# Altium PCB PCBLIB.PcbDoc
Units mil, origin at the board's own origin, x right, y up, seen from the top; angles counter-clockwise.
Board outline 6000 x 4000 mil, 2 copper layers (Top Layer, Bottom Layer); 15 components, 0 nets, 122 pads, 0 vias.
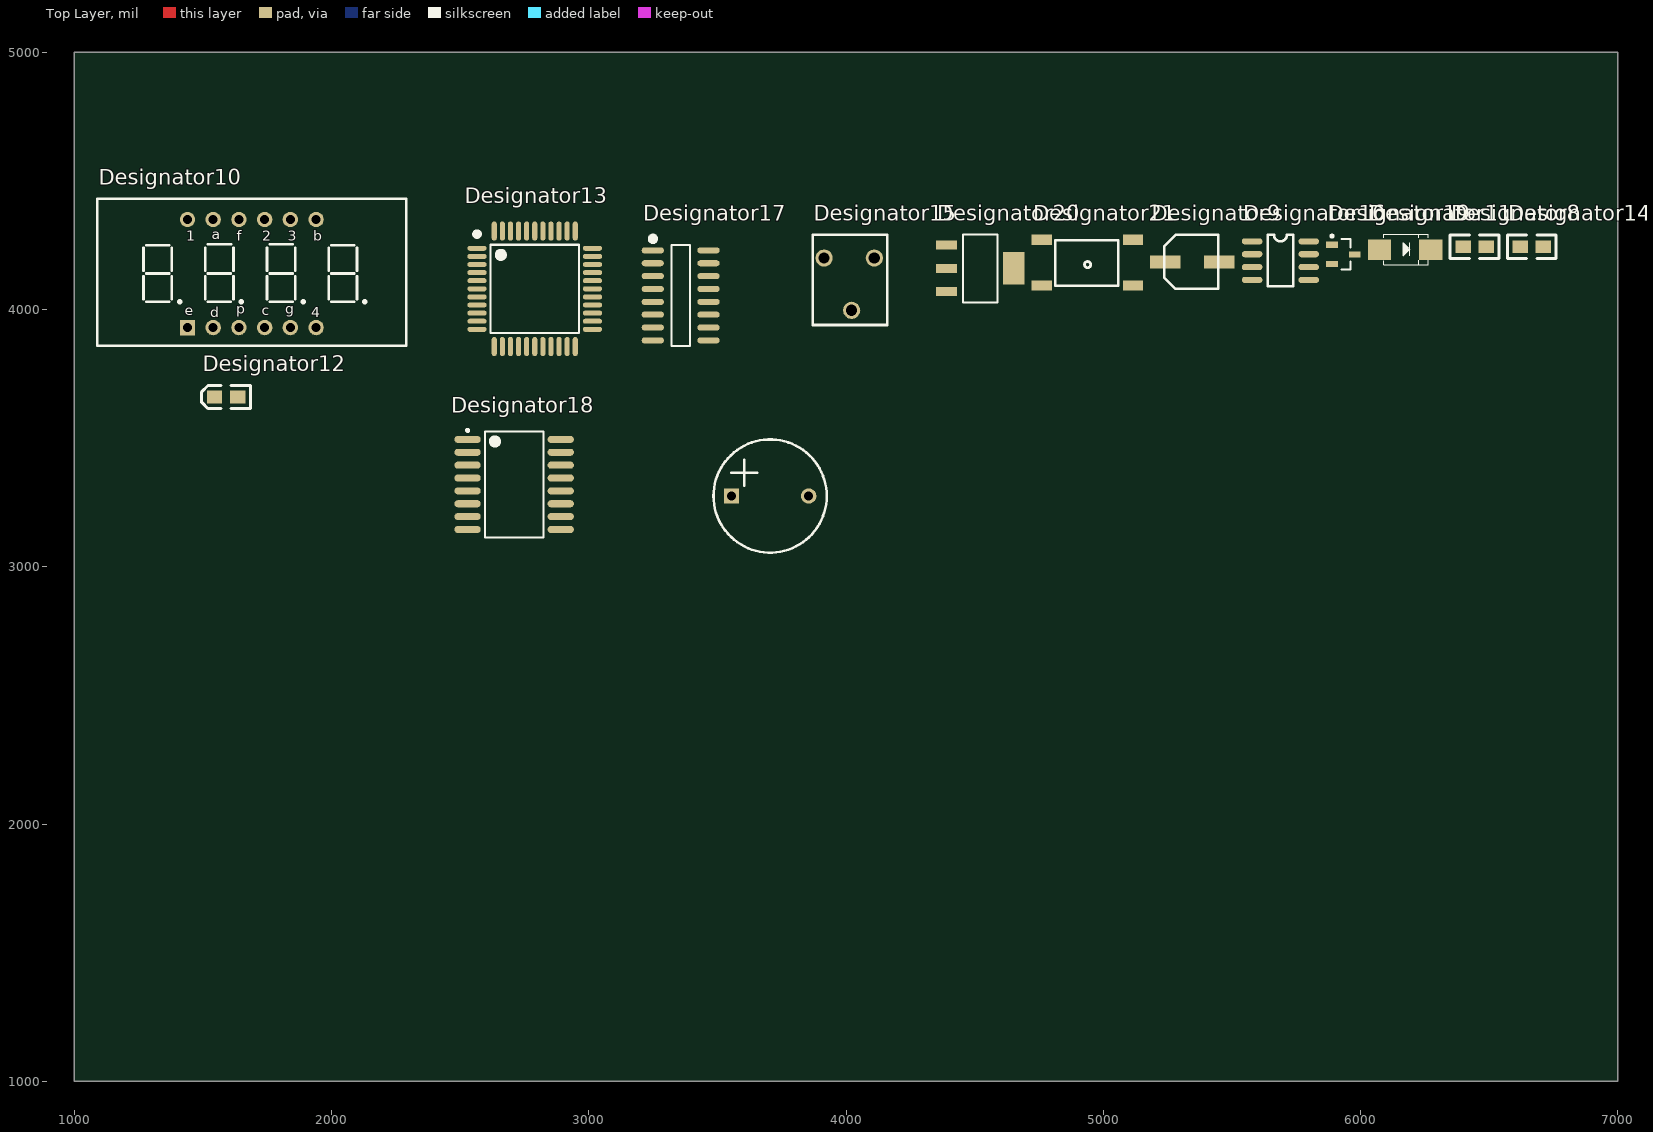
[diagram p0: Top Layer view]
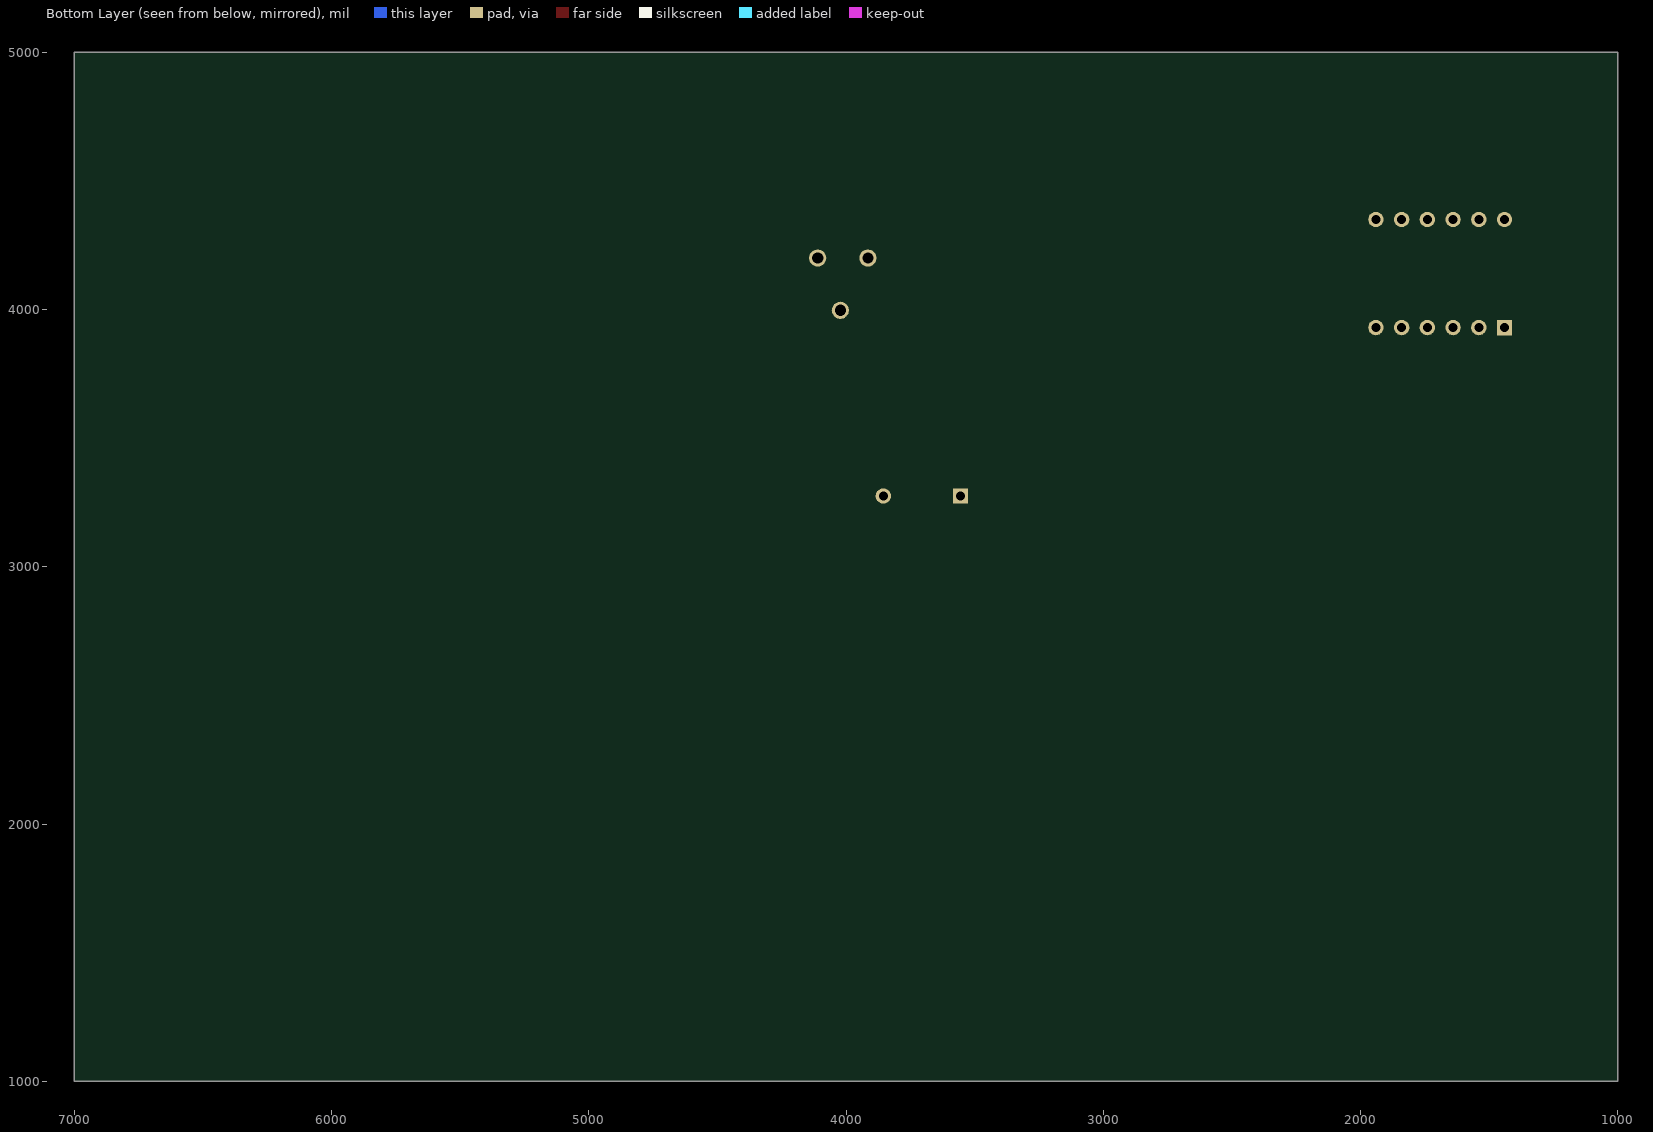
[diagram p1: Bottom Layer view, seen from below]

## Layer stack, top to bottom
Top Solder: solder mask 0.4, Solder Resist, Dk 3.5
Top Layer: signal copper 1.4
Dielectric 1: dielectric 12.6, FR-4, Dk 4.8
Bottom Layer: signal copper 1.4
Bottom Solder: solder mask 0.4, Solder Resist, Dk 3.5

## Board outline
1000,1000 7000,1000 7000,5000 1000,5000

## Design rules (kind name [scope] priority, off if disabled: settings)
AssemblyTestPointUsage [All] p0: scope1count=1 scope1_0_kind=Board scope1_0_value=Board scope2count=1 scope2_0_kind=Board scope2_0_value=Board commentlength=0
AssemblyTestpoint [All] p0: scope1count=1 scope1_0_kind=Board scope1_0_value=Board scope2count=1 scope2_0_kind=Board scope2_0_value=Board commentlength=0
Clearance [All] p0: scope1count=1 scope1_0_kind=Board scope1_0_value=Board scope2count=1 scope2_0_kind=Board scope2_0_value=Board commentlength=0 gap=10
Clearance [All] p1: gap=10 ignorepadtopadclearanceinfootprint=FALSE except(0: Arc-Hole Track-Hole SMDPad-Hole THPad-Hole Via-Hole Fill-Hole Poly-Hole Region-Hole Text-Hole)
ComponentClearance [All] p0: scope1count=1 scope1_0_kind=Board scope1_0_value=Board scope2count=1 scope2_0_kind=Board scope2_0_value=Board commentlength=0 gap=10 collisioncheckmode=3
DiffPairsRouting [All] p0: scope1count=1 scope1_0_kind=Board scope1_0_value=Board scope2count=1 scope2_0_kind=Board scope2_0_value=Board commentlength=0
FabricationTestPointUsage [All] p0: scope1count=1 scope1_0_kind=Board scope1_0_value=Board scope2count=1 scope2_0_kind=Board scope2_0_value=Board commentlength=0 valid=0 allowmultiple=FALSE
FabricationTestpoint [All] p0: scope1count=1 scope1_0_kind=Board scope1_0_value=Board scope2count=1 scope2_0_kind=Board scope2_0_value=Board commentlength=0 side=3 testpointundercomponent=TRUE minsize=40 maxsize=100 preferedsize=60 minholesize=0 maxholesize=40 preferedholesize=32 testpointgrid=1
FanoutControl Fanout_BGA [All] p0 off: scope1count=1 scope1_0_kind=Board scope1_0_value=Board scope2count=1 scope2_0_kind=Board scope2_0_value=Board commentlength=69 // Protel DXP Scope 1 Expression Was: IsBGA   Fanout_BGA (Default Rule)
FanoutControl Fanout_LCC [All] p0 off: scope1count=1 scope1_0_kind=Board scope1_0_value=Board scope2count=1 scope2_0_kind=Board scope2_0_value=Board commentlength=69 // Protel DXP Scope 1 Expression Was: IsLCC   Fanout_LCC (Default Rule)
FanoutControl Fanout_SOIC [All] p0 off: scope1count=1 scope1_0_kind=Board scope1_0_value=Board scope2count=1 scope2_0_kind=Board scope2_0_value=Board commentlength=71 // Protel DXP Scope 1 Expression Was: IsSOIC   Fanout_SOIC (Default Rule)
FanoutControl Fanout_Small [All] p0 off: scope1count=1 scope1_0_kind=Board scope1_0_value=Board scope2count=1 scope2_0_kind=Board scope2_0_value=Board commentlength=84 // Protel DXP Scope 1 Expression Was: (CompPinCount < 5)   Fanout_Small (Default Rule)
FanoutControl Fanout_Default [All] p0: scope1count=1 scope1_0_kind=Board scope1_0_value=Board scope2count=1 scope2_0_kind=Board scope2_0_value=Board commentlength=30 // Fanout_Default (Default Rule)
Height [All] p0: scope1count=1 scope1_0_kind=Board scope1_0_value=Board scope2count=1 scope2_0_kind=Board scope2_0_value=Board commentlength=0
HoleSize [All] p0: scope1count=1 scope1_0_kind=Board scope1_0_value=Board scope2count=1 scope2_0_kind=Board scope2_0_value=Board commentlength=0 absolutevalues=TRUE maxlimit=100 minlimit=1 maxpercent=80.000 minpercent=20.000
HoleToHoleClearance [All] p0: scope1count=1 scope1_0_kind=Board scope1_0_value=Board scope2count=1 scope2_0_kind=Board scope2_0_value=Board commentlength=0
LayerPairs [All] p0: scope1count=1 scope1_0_kind=Board scope1_0_value=Board scope2count=1 scope2_0_kind=Board scope2_0_value=Board commentlength=0 enforce=TRUE
MinimumSolderMaskSliver [All] p0: scope1count=1 scope1_0_kind=Board scope1_0_value=Board scope2count=1 scope2_0_kind=Board scope2_0_value=Board commentlength=0
NetAntennae [All] p0: scope1count=1 scope1_0_kind=Board scope1_0_value=Board scope2count=1 scope2_0_kind=Board scope2_0_value=Board commentlength=0
PasteMaskExpansion [All] p0: scope1count=1 scope1_0_kind=Board scope1_0_value=Board scope2count=1 scope2_0_kind=Board scope2_0_value=Board commentlength=0 expansion=0
PlaneClearance [All] p0: scope1count=1 scope1_0_kind=Board scope1_0_value=Board scope2count=1 scope2_0_kind=Board scope2_0_value=Board commentlength=0 clearance=20
PlaneConnect [All] p0: scope1count=1 scope1_0_kind=Board scope1_0_value=Board scope2count=1 scope2_0_kind=Board scope2_0_value=Board commentlength=0 planeconnectstyle=Relief reliefexpansion=20 reliefentries=4 reliefconductorwidth=10 reliefairgap=10
PolygonConnect [All] p0: scope1count=1 scope1_0_kind=Board scope1_0_value=Board scope2count=1 scope2_0_kind=Board scope2_0_value=Board commentlength=0 connectstyle=Relief reliefconductorwidth=10 reliefentries=4 polygonreliefangle="90 Angle"
PolygonConnect [All] p1: connectstyle=Relief reliefconductorwidth=10 reliefentries=4 polygonreliefangle="90 Angle" airgapwidth=10
RoutingCorners [All] p0: scope1count=1 scope1_0_kind=Board scope1_0_value=Board scope2count=1 scope2_0_kind=Board scope2_0_value=Board commentlength=0 cornerstyle=45-Degree minsetback=100 maxsetback=100
RoutingLayers [All] p0: scope1count=1 scope1_0_kind=Board scope1_0_value=Board scope2count=1 scope2_0_kind=Board scope2_0_value=Board commentlength=0 top layer=Automatic bottom layer=Automatic
RoutingPriority [All] p0: scope1count=1 scope1_0_kind=Board scope1_0_value=Board scope2count=1 scope2_0_kind=Board scope2_0_value=Board commentlength=0
RoutingTopology [All] p0: scope1count=1 scope1_0_kind=Board scope1_0_value=Board scope2count=1 scope2_0_kind=Board scope2_0_value=Board commentlength=0 topology=Shortest
RoutingVias [All] p0: scope1count=1 scope1_0_kind=Board scope1_0_value=Board scope2count=1 scope2_0_kind=Board scope2_0_value=Board commentlength=0 holewidth=28 width=50 viastyle="Through Hole" minholewidth=28 minwidth=50 maxholewidth=28 maxwidth=50
RoutingVias [All] p1: holewidth=28 width=50 viastyle="Through Hole" minholewidth=28 minwidth=50 maxholewidth=28 maxwidth=50
ShortCircuit [All] p0: scope1count=1 scope1_0_kind=Board scope1_0_value=Board scope2count=1 scope2_0_kind=Board scope2_0_value=Board commentlength=0 allowed=FALSE
SilkToBoardRegionClearance [All] p0: scope1count=1 scope1_0_kind=Board scope1_0_value=Board scope2count=1 scope2_0_kind=Board scope2_0_value=Board commentlength=0
SilkToSilkClearance [All] p0: scope1count=1 scope1_0_kind=Board scope1_0_value=Board scope2count=1 scope2_0_kind=Board scope2_0_value=Board commentlength=0
SilkToSolderMaskClearance [All] p0 off: scope1count=1 scope1_0_kind=Board scope1_0_value=Board scope2count=1 scope2_0_kind=Board scope2_0_value=Board commentlength=44 // Protel DXP Scope 1 Expression Was: IsPad
SolderMaskExpansion [All] p0: scope1count=1 scope1_0_kind=Board scope1_0_value=Board scope2count=1 scope2_0_kind=Board scope2_0_value=Board commentlength=0 expansion=4
SolderMaskExpansion [All] p1: expansion=4 istentingtop=FALSE
UnRoutedNet [All] p0: scope1count=1 scope1_0_kind=Board scope1_0_value=Board scope2count=1 scope2_0_kind=Board scope2_0_value=Board commentlength=0
UnpouredPolygon [All] p0: scope1count=1 scope1_0_kind=Board scope1_0_value=Board scope2count=1 scope2_0_kind=Board scope2_0_value=Board commentlength=0
Width [All] p0: scope1count=1 scope1_0_kind=Board scope1_0_value=Board scope2count=1 scope2_0_kind=Board scope2_0_value=Board commentlength=0 maxlimit=10 minlimit=10 preferedwidth=10
Width [All] p1: maxlimit=10 minlimit=10 preferedwidth=10
30 further rules are at their usual default settings.

## Components (designator, comment, footprint, x,y, rotation, side; value= is the part's Value field where it differs from the comment)
Designator8 "Comment" C0805 6398.81,4244 r0 top
Designator9 "Comment" CAP-2 5306.11,4165.22 r0 top
Designator10 "Comment" D_SEG-0.36 1440,3930 r0 top
Designator11 "Comment" DIODE 6073.53,4232.81 r0 top
Designator12 "Comment" LED0805 1545,3660 r0 top
Designator13 "Comment" LQFP-44 2475,3980.59 r0 top
Designator14 "Comment" R0805 6620.81,4244 r0 top
Designator15 "Comment" RB 4110,4200 r0 top
Designator16 "Comment" SO-8 5578.79,4265 r0 top
Designator17 "Comment" SO-16_N 3248.93,4230 r0 top
Designator18 "Comment" SO-16_W 2710,3320 r0 top
Designator19 "Comment" SOT23-3 5889.43,4251.69 r0 top
Designator20 "Comment" SOT-223 4390.68,4250.53 r0 top
Designator21 "Comment" Switch 4938,4180.26 r0 top
? "Comment" BUZZ 3555,3275 r0 top

## Footprints (in the part's own frame and the unit in brackets; to place one, negate y for a bottom-side part, rotate by r counter-clockwise, add the part's x,y. Pads: shape width x height; smd on the part's side, far side on the other; paste and mask are expansions set on the pad)
BUZZ [mil]
  rect 60x60 hole 35: 1(0,0)
  round 60 hole 35: 2(300,0)
  silkscreen extent -70,-220 370,220
C0805 [mil] "电容"
  rect 60x50 smd: 1(0,0) 2(90,0)
  silkscreen extent -50,-45 140,45
CAP-2 [mm] "电解电容"
  rect 3x1.274 smd: 1(-1.635,0.502) 2(3.699,0.502)
  silkscreen extent -1.76,-2.16 3.57,3.17
D_SEG-0.36 [mil] "4位数码管"
  rect 60x60 hole 35: 1(0,0)
  round 60 hole 35: 2(100,0) 3(200,0) 4(300,0) 5(400,0) 6(500,0) 7(500,420) 8(400,420) 9(300,420) 10(200,420) 11(100,420) 12(0,420)
  silkscreen extent -350,-71 850,500
DIODE [mm] "二极管"
  rect 2.3x2 smd: 1(0.01,0) 2(5.08,0)
  silkscreen extent 0.41,-1.47 4.81,1.53
LED0805 [mil] "LED"
  rect 60x50 smd: 1(90,0) 2(0,0)
  silkscreen extent -50,-45 140,45
LQFP-44 [mm] "IAP15F2K61S2\STC12C5A60S2\STC15F2K60S2-QFP封装"
  oval 1.9x0.5 smd: 1(2.301,6.54) 2(2.301,5.74) 3(2.301,4.94) 4(2.301,4.14) 5(2.301,3.34) 6(2.301,2.54) 7(2.301,1.74) 8(2.301,0.94) 9(2.301,0.14) 10(2.301,-0.66) 11(2.301,-1.46) 23(13.701,-1.46) 24(13.701,-0.66) 25(13.701,0.14) 26(13.701,0.94) 27(13.701,1.74) 28(13.701,2.54) 29(13.701,3.34) 30(13.701,4.14) 31(13.701,4.94) 32(13.701,5.74) 33(13.701,6.54)
  oval 0.5x1.9 smd: 12(4.001,-3.16) 13(4.801,-3.16) 14(5.601,-3.16) 15(6.401,-3.16) 16(7.201,-3.16) 17(8.001,-3.16) 18(8.801,-3.16) 19(9.601,-3.16) 20(10.401,-3.16) 21(11.201,-3.16) 22(12.001,-3.16) 34(12.001,8.24) 35(11.201,8.24) 36(10.401,8.24) 37(9.601,8.24) 38(8.801,8.24) 39(8.001,8.24) 40(7.201,8.24) 41(6.401,8.24) 42(5.601,8.24) 43(4.801,8.24) 44(4.001,8.24)
  silkscreen extent 2.08,-1.81 12.35,8.16
R0805 [mil] "电阻"
  rect 60x50 smd: 1(0,0) 2(90,0)
  silkscreen extent -50,-45 140,45
RB [mm] "电位器"
  round 1.7 hole 1.1: 1(0,0) 2(-2.235,-5.156) 3(-4.953,0)
  silkscreen extent -6.1,-6.6 1.27,2.29
SO-8 [mil]
  oval 80x24 smd: 1(0,0) 2(0,-50) 3(0,-100) 4(0,-150) 5(220,-150) 6(220,-100) 7(220,-50) 8(220,0)
  silkscreen extent 60,-175 160,25
SO-16_N [mm] "16-Pin Small Outline Integrated Circuit 1.27 mm Pitch, IPC Medium Density-SOP型封装"
  oval 2.2x0.6 smd: 1(0,0) 2(0,-1.27) 3(0,-2.54) 4(0,-3.81) 5(0,-5.08) 6(0,-6.35) 7(0,-7.62) 8(0,-8.89) 9(5.5,-8.89) 10(5.5,-7.62) 11(5.5,-6.35) 12(5.5,-5.08) 13(5.5,-3.81) 14(5.5,-2.54) 15(5.5,-1.27) 16(5.5,0)
  silkscreen extent -0.24,-9.45 3.67,1.4
SO-16_W [mm] "SOIC, 16-Leads, Body 10.3x7.5mm, Pitch 1.27mm, IPC Low Density"
  oval 2.6x0.7 smd: 1(-4.6,4.445) 2(-4.6,3.175) 3(-4.6,1.905) 4(-4.6,0.635) 5(-4.6,-0.635) 6(-4.6,-1.905) 7(-4.6,-3.175) 8(-4.6,-4.445) 9(4.6,-4.445) 10(4.6,-3.175) 11(4.6,-1.905) 12(4.6,-0.635) 13(4.6,0.635) 14(4.6,1.905) 15(4.6,3.175) 16(4.6,4.445)
  silkscreen extent -4.72,-5.25 2.9,5.47
SOT23-3 [mm] "NPN(S9013):1B2E3C-SOP型封装"
  rect 1.15x0.6 smd: 1(0,0) 2(0,-1.9) 3(2.25,-0.95)
  silkscreen extent -0.12,-2.45 1.83,0.97
SOT-223 [mm] "SOP型封装"
  rect 2.1x0.9 smd: 1(0,0) 2(0,-2.3) 3(0,-4.6)
  rect 2.1x3.2 smd: 4(6.644,-2.3)
  silkscreen extent 1.62,-5.67 5.05,1.03
Switch [mm]
  rect 2x1 smd: 1(4.504,-2.208) 2(4.504,2.313) 3(-4.496,2.313) 4(-4.496,-2.208)
  silkscreen extent -3.17,-2.24 3.08,2.26

## Nets (pads, with @x,y where several pads share a name; then routed paths per layer and width w, separated by ;. In a path a pad name is that pad's centre, name@x,y a point inside that pad or via, vN(x,y) a via of type N, cw(c..) or ccw(c..) an arc to the next point about the centre after c; other vN are vias at no path point)
pads on no net: ?.1 ?.2 Designator8.1 Designator8.2 Designator9.1 Designator9.2 Designator10.1 Designator10.2 Designator10.3 Designator10.4 Designator10.5 Designator10.6 Designator10.7 Designator10.8 Designator10.9 Designator10.10 Designator10.11 Designator10.12 Designator11.1 Designator11.2 Designator12.1 Designator12.2 Designator13.1 Designator13.2 Designator13.3 Designator13.4 Designator13.5 Designator13.6 Designator13.7 Designator13.8 Designator13.9 Designator13.10 Designator13.11 Designator13.12 Designator13.13 Designator13.14 Designator13.15 Designator13.16 Designator13.17 Designator13.18 Designator13.19 Designator13.20 Designator13.21 Designator13.22 Designator13.23 Designator13.24 Designator13.25 Designator13.26 Designator13.27 Designator13.28 Designator13.29 Designator13.30 Designator13.31 Designator13.32 Designator13.33 Designator13.34 Designator13.35 Designator13.36 Designator13.37 Designator13.38 Designator13.39 Designator13.40 Designator13.41 Designator13.42 Designator13.43 Designator13.44 Designator14.1 Designator14.2 Designator15.1 Designator15.2 Designator15.3 Designator16.1 Designator16.2 Designator16.3 Designator16.4 Designator16.5 Designator16.6 Designator16.7 Designator16.8 Designator17.1 Designator17.2 Designator17.3 Designator17.4 Designator17.5 Designator17.6 Designator17.7 Designator17.8 Designator17.9 Designator17.10 Designator17.11 Designator17.12 Designator17.13 Designator17.14 Designator17.15 Designator17.16 Designator18.1 Designator18.2 Designator18.3 Designator18.4 Designator18.5 Designator18.6 Designator18.7 Designator18.8 Designator18.9 Designator18.10 Designator18.11 Designator18.12 Designator18.13 Designator18.14 Designator18.15 Designator18.16 Designator19.1 Designator19.2 Designator19.3 Designator20.1 Designator20.2 Designator20.3 Designator20.4 Designator21.1 Designator21.2 Designator21.3 Designator21.4

## Text inside footprints (layer, text, board x,y; h text height)
Designator10: Top Overlay "4" at 1921,3970.72 h40; Top Overlay "g" at 1819.34,3984.05 h40; Top Overlay "c" at 1729.34,3977.38 h40; Top Overlay "p" at 1629.34,3984.05 h40; Top Overlay "d" at 1529.34,3970.72 h40; Top Overlay "e" at 1429.34,3977.38 h40; Top Overlay "b" at 1927.98,4266.66 h40; Top Overlay "3" at 1829.41,4266.66 h40; Top Overlay "2" at 1730.84,4266.66 h40; Top Overlay "f" at 1632.26,4266.66 h40; Top Overlay "a" at 1533.69,4273.33 h40; Top Overlay "1" at 1435.12,4266.66 h40
?: Keep-Out Layer "Designator7" at 3490,3550 h60